# EAGLE board Motion Shield 1.0 (EAGLE 5.11)
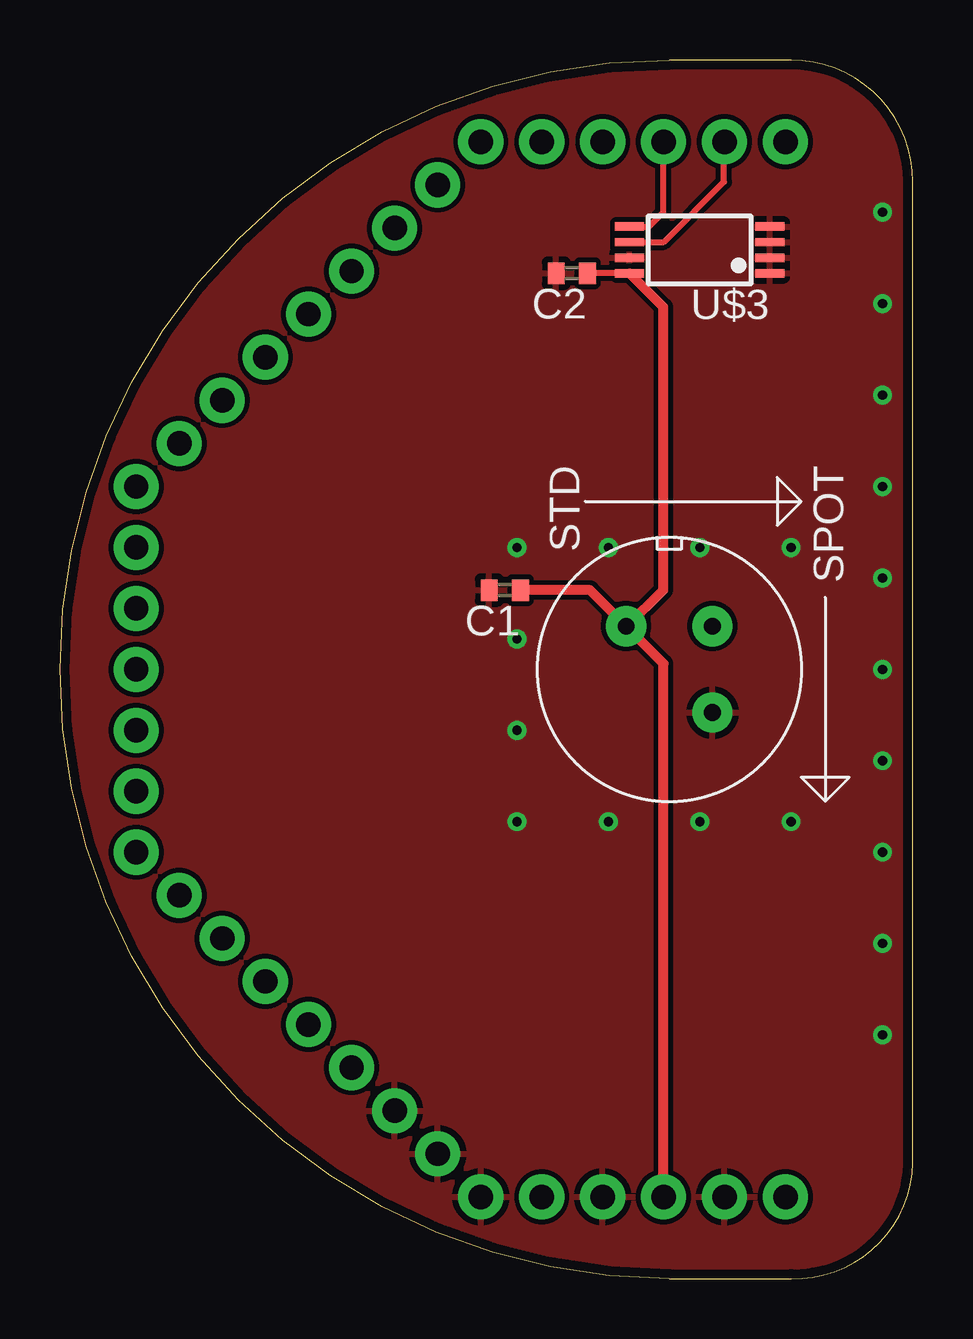
[diagram p0: board, top side]
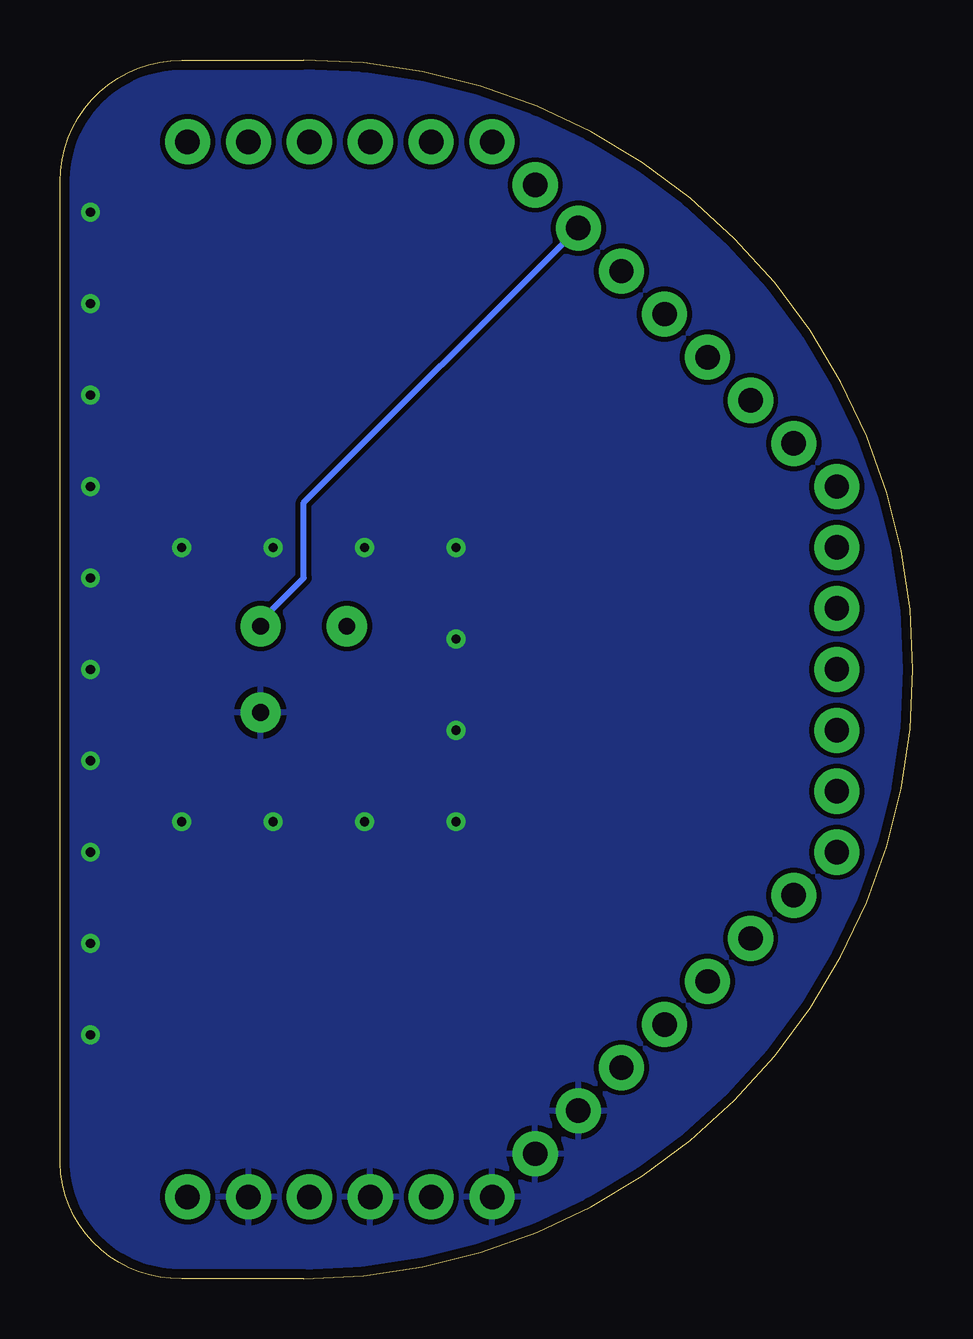
[diagram p1: board, bottom side, seen from below]

Size 35.56 x 50.8 mm. Coordinates in mm from the lower left corner, seen from the top.
Outline: 25.4,0 arc-180 25.4,50.8 30.48,50.8 arc-90 35.56,45.72 35.56,4.83 arc-90 30.48,0 25.4,0
Copper layers (1*16): Top 0.035mm / dielectric 1.5mm / Bottom 0.035mm
Design rules "PDX (Production)": minimum track width 6mil, minimum drill 15mil, track to track 6mil, track to pad 6mil, pad to pad 4mil, via to via 6mil, smd to smd 4mil, copper to edge 15mil, drill to drill 6mil, minimum pad ring 10mil, minimum via ring 8mil, stop-mask expansion 4mil, vias tented up to drill 25mil, thermal gap 10mil

## Footprints (pad centres in the part's own frame; a part is rotated, then mirrored left to right if it is on the bottom)
C0402 = smd 0.7 x 0.9: 1 -0.65,0; 2 0.65,0
#NEBULA-PTH@1 = drill 1.016 pad 1.88 round: 3.3V -25.637,-47.388; 5V -30.716,-47.388; A0 -36.848,-7.004; A1 -38.645,-8.8; A2 -40.44,-10.596; A3 -42.237,-12.392; A4 -47.625,-22.86; A5 -47.625,-25.4; A6 -40.44,-40.204; A7 -38.645,-42; BAT -20.557,-47.388; COM1_RX -25.636,-3.412; COM1_TX -23.096,-3.412; COM2_RX -47.625,-30.48; COM2_TX -47.625,-27.94; D0 -47.625,-20.32; D1 -47.625,-17.78; D2 -45.829,-15.984; D3 -44.032,-14.188; DAC1 -47.625,-33.02; DAC2 -45.829,-34.816; GND1 -36.848,-43.796; GND2 -35.052,-45.592; GND3 -33.256,-47.388; GND4 -28.177,-47.388; GND5 -23.097,-47.388; MCO -20.556,-3.412; T0 -28.176,-3.412; T1 -30.716,-3.412; T2 -33.256,-3.412; T3 -35.052,-5.208; TA0 -44.032,-36.612; TA1 -42.237,-38.408
PANASONIC-AMN41122 = drill 0.7 pad 1.676 round: GND 1.8,1.8; OUT -1.8,1.8; VCC -1.8,-1.8
TSSOP8 = smd 1.2 x 0.35: 1 -2.925,0.975; 2 -2.925,0.325; 3 -2.925,-0.325; 4 -2.925,-0.975; 5 2.925,-0.975; 6 2.925,-0.325; 7 2.925,0.325; 8 2.925,0.975

## Placement (x,y rotation side)
C1  0.1uF  [C0402]  18.54,28.7 180 top
C2  0.1uF  [C0402]  21.34,41.91 180 top
INFO2  Warren D Greenway and Evan Teitelman  [%CC-BY-SA@1]  -2.54,-10.16 0 top  (outside the outline)
LOGO1  #PYGMYLOGONORMAL  [#PYGMYLOGO]  10.16,25.15 270 top
NEBULA1  #NEBULAPTH  [#NEBULA-PTH@1]  50.8,50.8 0 top
U2  PANASONIC-AMN41122  [PANASONIC-AMN41122]  25.4,25.4 270 top
U$3  EEPROM-ATMEL-AT24HC02B  [TSSOP8]  26.67,42.88 180 top

## Library data of the parts
C1 C2 = rcl
INFO2 NEBULA1 = PygmyBoards
LOGO1 U2 U$3 = Pygmy

## Nets
3.3V: C1.1 C2.1 NEBULA1.3.3V U2.VCC U$3.8
5V: NEBULA1.5V
GND: C1.2 C2.2 NEBULA1.GND1 NEBULA1.GND2 NEBULA1.GND3 NEBULA1.GND4 NEBULA1.GND5 U2.GND U$3.1 U$3.2 U$3.3 U$3.4 U$3.7
SCL: NEBULA1.COM1_TX U$3.6
SDA: NEBULA1.COM1_RX U$3.5
SENSOR: NEBULA1.A0 U2.OUT

## Tracks (layer width: path | path; a pad name or v marks a point on that pad's centre or on a via)
3.3V
  Top 0.254: U$3.8 C2.1
  Top 0.406: NEBULA1.3.3V 25.16,25.64 U2.VCC | U2.VCC 23.64,27.2 25.15,28.7 25.15,40.51 U$3.8 | C1.1 22.1,28.7 U2.VCC
GND  (via drill 0.38)
  other vias: 34.29,10.16 19.05,22.86 19.05,26.67 30.48,19.05 22.86,19.05 26.67,19.05 19.05,30.48 26.67,30.48 19.05,19.05 22.86,30.48 34.29,44.45 34.29,40.64 34.29,36.83 34.29,33.02 34.29,29.21 34.29,25.4 34.29,21.59 34.29,17.78 34.29,13.97 30.48,30.48
  pour Bottom (isolate 0.203): -2.54,-2.54 38.1,-2.54 38.1,53.34 -2.54,53.34
  pour Top (isolate 0.203): -1.27,-1.27 36.83,-1.27 36.83,52.07 -1.27,52.07
SCL
  Top 0.254: U$3.6 25.17,43.21 27.69,45.72 27.69,47.37 NEBULA1.COM1_TX
SDA
  Top 0.254: U$3.5 24.55,43.86 25.15,44.45 25.15,47.37 NEBULA1.COM1_RX
SENSOR
  Bottom 0.254: U2.OUT 27.2,27.41 25.4,29.21 25.4,32.35 NEBULA1.A0

## Text on the board
bTest: Designed By: | Warren D Greenway | Evan Teitelman | Pygmy Motion Shield | V1.0
Document: Pygmy GasSensor Shield | Version 1.0 | Standard Grid: 50mil | Routing Grids: 8mil / 4mil